# Altium PCB ArgoFCRev2.PcbDoc (part 2 of 6)
Units mm, origin at the board's own origin, x right, y up, seen from the top; angles counter-clockwise.
Board outline 140.21 x 119.63 mm, 4 copper layers (Top Layer, GND Plane, PWR Plane, Bottom Layer), stack 0.603 mm thick; 413 components, 223 nets, 1421 pads, 793 vias.
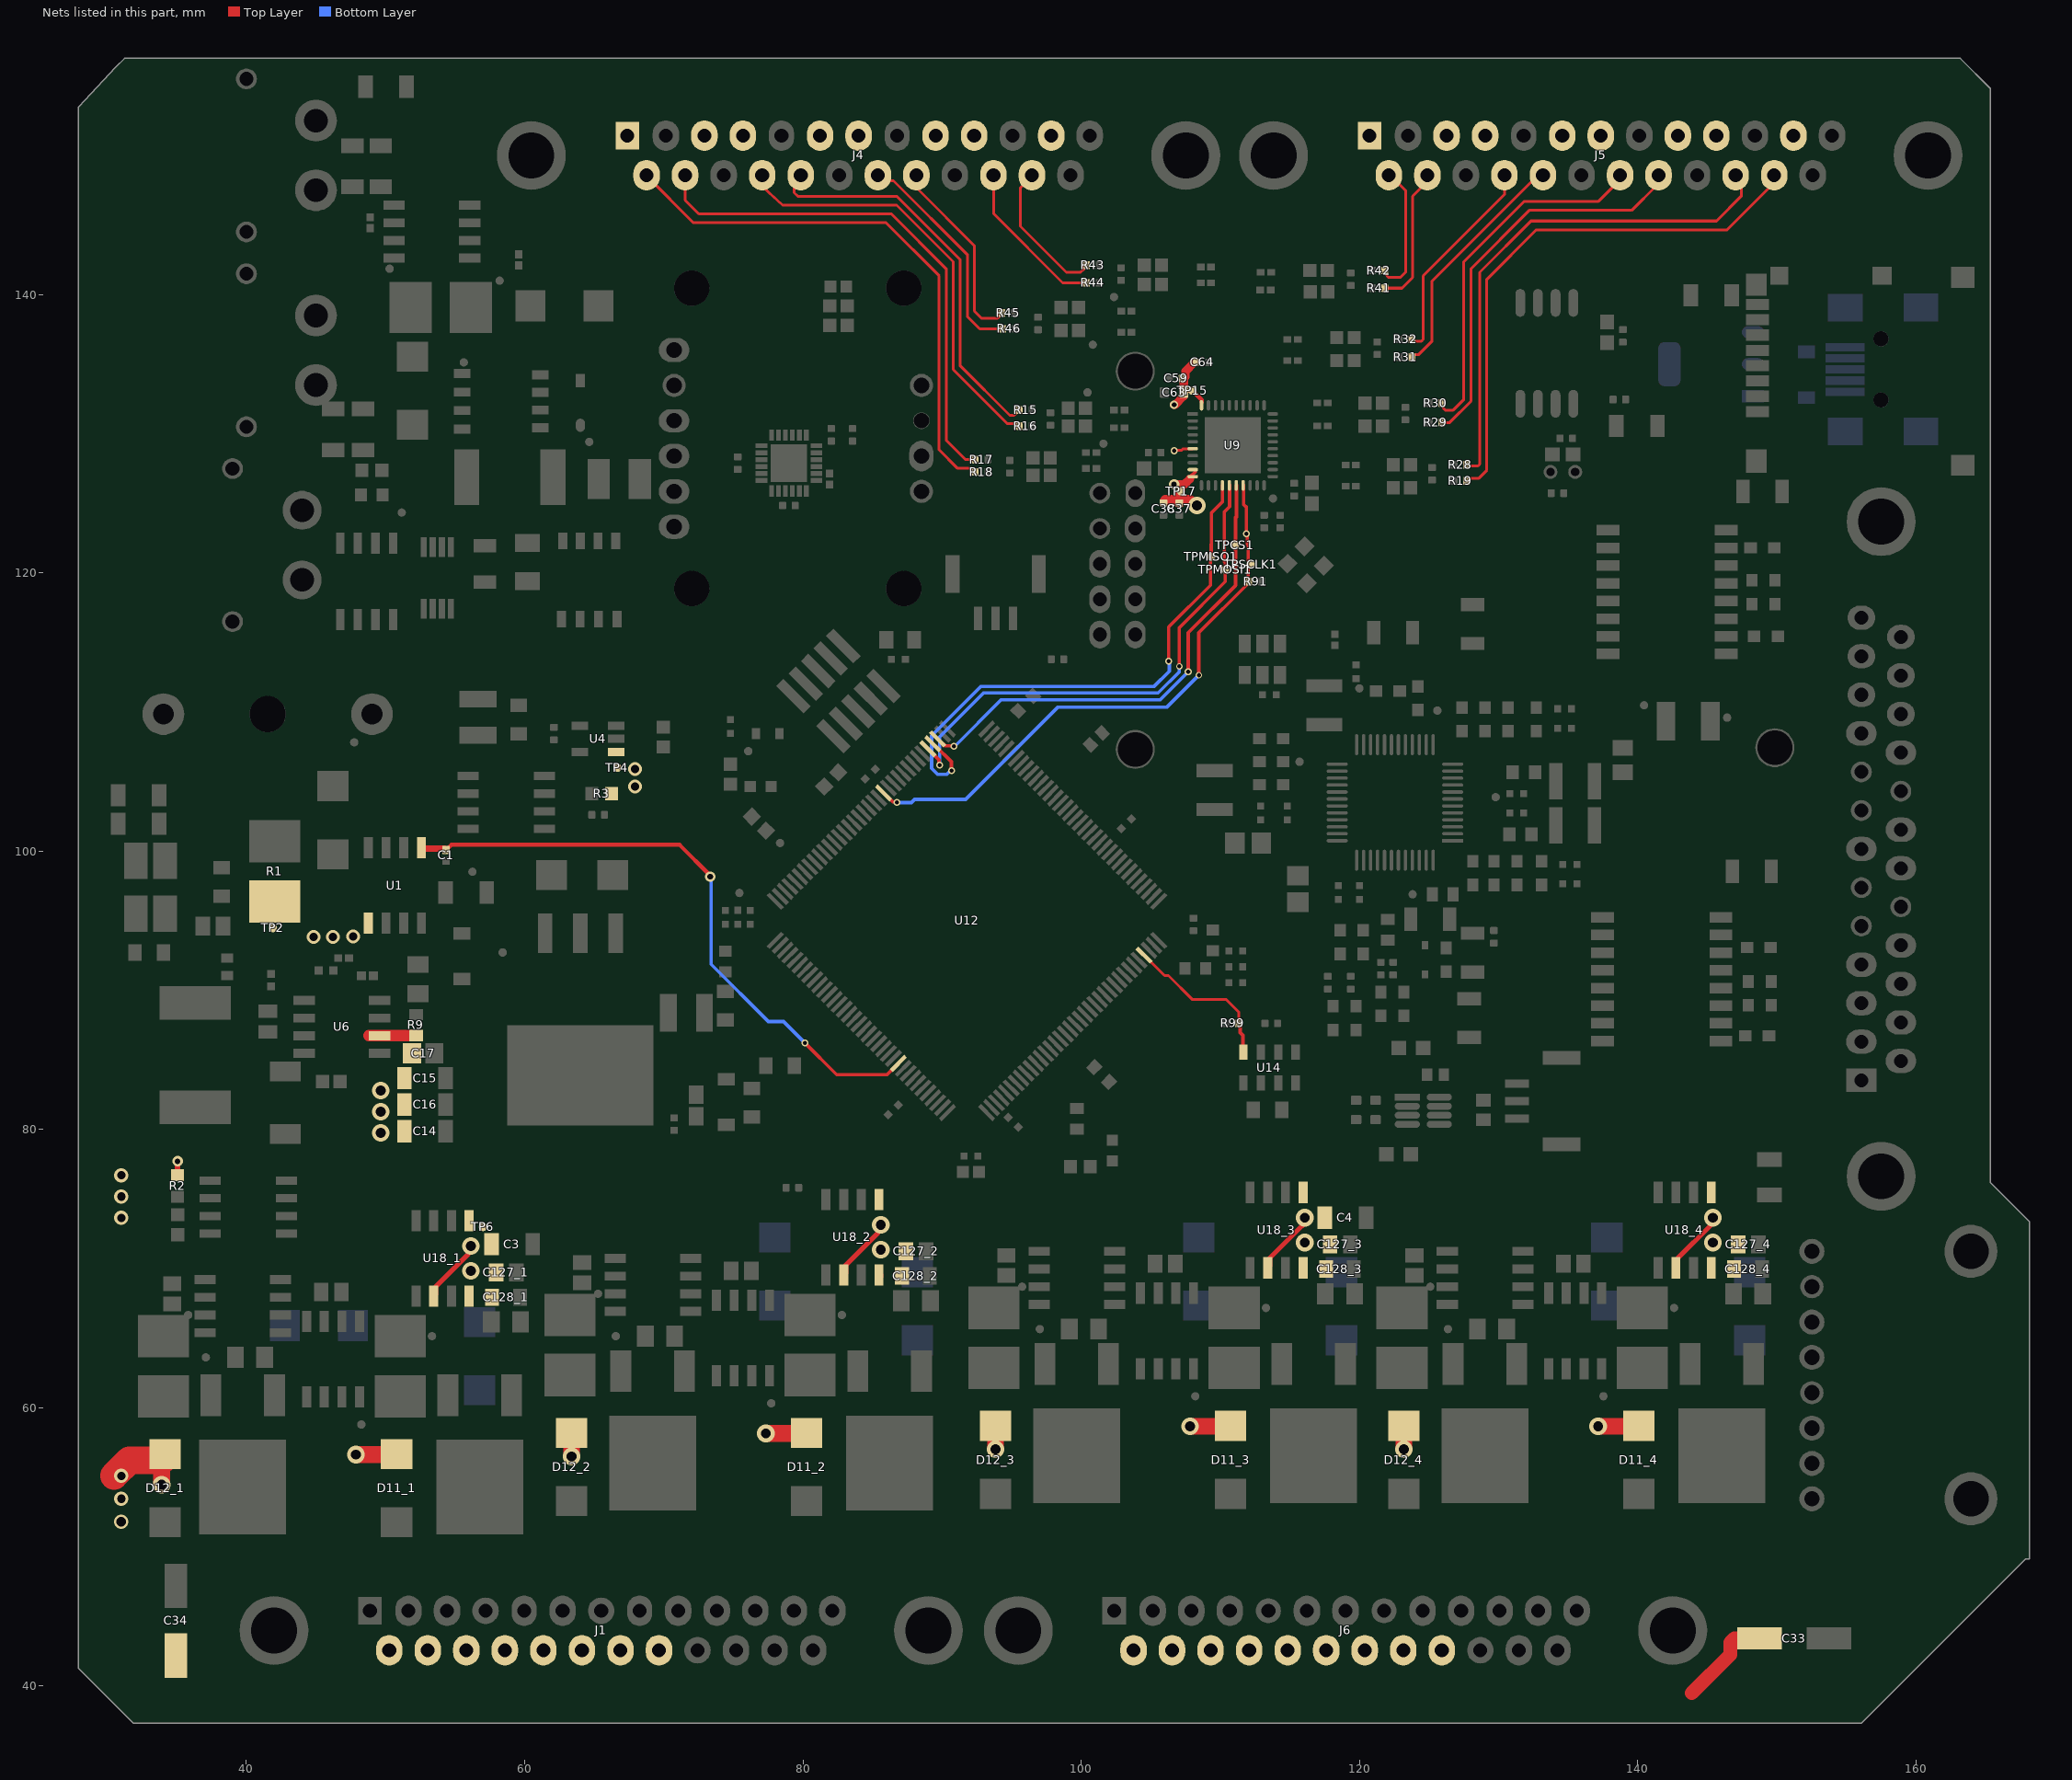
[diagram p4: the nets of this part, all layers, seen from the top]

## Footprints (in the part's own frame and the unit in brackets; to place one, negate y for a bottom-side part, rotate by r counter-clockwise, add the part's x,y. Pads: shape width x height; smd on the part's side, far side on the other; paste and mask are expansions set on the pad) (continued)
FP-MUSB-05-S-B-SM-A-MFG [mm]
  rect 0.6x2.8 smd paste+0 mask+0: 1(-1.6,-3.83) 2(-0.8,-3.83) 3(0,-3.83) 4(0.8,-3.83) 5(1.6,-3.83)
  rect 2x2.5 smd paste+0 mask+0: 6(-4.45,-3.83) 7(4.44,-3.83) 8(-4.45,1.62) 9(4.45,1.62)
  round 1.1 hole 1.1 unplated paste-2539.97 mask+0: ""(-2.2,-1.25) ""(2.2,-1.25)
  body extent -5,-4.9 5,4.6, height 4.1
FP-NCP18-0_15-IPC_A [mm]
  rect 1.306x1.058 smd paste+0 mask+0: 1(-0.776,0) 2(0.776,0)
  silkscreen extent -1.43,-0.93 1.43,0.93, body extent -1.93,-1.03 1.93,1.03, height 0.25
FP-PA2512E-0R001-0R004-MFG [mm]
  rect 3.05x3.68 smd paste+0 mask+0: 1(-2.16,0) 2(2.16,0)
  silkscreen extent -0.26,-1.72 0.26,1.72, body extent -3.78,-1.94 3.78,1.94, height 0.25
FP-RC0603-0_55-IPC_B [mm]
  rect 0.859x0.912 smd paste+0 mask+0: 1(-0.777,0) 2(0.777,0)
  silkscreen extent -1.21,-0.86 1.21,0.86, body extent -1.46,-0.71 1.46,0.71, height 0.25
FP-RMCF1210-IPC_A [mm]
  rect 1.604x2.855 smd paste+0 mask+0: 1(-1.476,0) 2(1.476,0)
  silkscreen extent -0.37,-1.43 0.37,1.43, body extent -2.78,-1.93 2.78,1.93, height 0.25
FP-RT0603-MFG [mm]
  rect 0.9x0.8 smd paste+0 mask+0: 1(-0.85,0) 2(0.85,0)
  silkscreen extent -0.85,-0.81 0.86,0.8, body extent -1.4,-0.55 1.4,0.55, height 0.25
FP-SM03B-GHS-TB_LF_SN-MFG [mm]
  rect 0.6x1.7 smd paste+0 mask+0: 1(-1.25,2.275) 2(0,2.275) 3(1.25,2.275)
  rect 1x2.7 smd paste+0 mask+0: 4(-3.1,-0.925) 5(3.1,-0.925)
  silkscreen extent -3.5,-2.02 3.5,3.8, body extent -3.7,-2.37 3.7,3.22, height 0.25
FP-SMBJ-MFG [mm]
  rect 2.16x2.26 smd paste+0 mask+0: 1(-2.45,0) 2(2.45,0)
  silkscreen extent -4.22,-1.97 2.37,1.97, body extent -3.63,-2.07 3.63,2.07, height 0.25
FP-SOD123-IPC_C [mm]
  rect 0.957x0.662 smd paste+0 mask+0: 1(-1.6,0)
  rrect100% 0.957x0.662 smd paste+0 mask+0: 2(1.6,0)
  silkscreen extent -2.82,-0.77 1.33,0.77, body extent -2.18,-0.87 2.18,0.87, height 0.25
FP-SOT223-0046067-IPC_C [mm]
  rect 1.604x0.88 smd paste+0 mask+0: 1(-3,-2.3)
  rrect100% 1.604x0.88 smd paste+0 mask+0: 2(-3,0) 3(-3,2.3)
  rrect55% 1.604x3.18 smd paste+0 mask+0: 4(3,0)
  body extent -3.5,-3.25 3.5,3.25, height 1.9
INDPM8682X400N [mm]
  rect 2.4x5.1 smd: 1(-3.75,0) 2(3.75,0)
  silkscreen extent -4.32,-4.09 4.32,4.09, body extent -4.3,-4.1 4.3,4.1, height 3.9
INF-PG-TDSON-8-1_V [mm]
  rect 0.65x1.2 smd: 1(-1.905,-2.825) 2(-0.635,-2.825) 3(0.635,-2.825) 4(1.905,-2.825) 5(2.007,2.794) 6(0.66,2.794) 7(-0.66,2.794) 8(-2.007,2.794)
  Top Layer region: 0.315,2.925 1.015,2.925 1.015,3.425 0.315,3.425
  Top Layer region: -1.015,2.925 -0.315,2.925 -0.315,3.425 -1.015,3.425
  Top Layer region: 1.65,2.925 2.35,2.925 2.35,3.425 1.65,3.425
  Top Layer region: -2.35,2.925 -1.65,2.925 -1.65,3.425 -2.35,3.425
  Top Layer region: -2.35,2.925 -2.35,-1.575 2.35,-1.575 2.35,2.925
  silkscreen extent -2.23,-3.94 -2.03,-3.74, body extent -2.58,-3.08 2.58,3.08, height 1
KTT0003B_N [mm]
  rect 2.85x1.05 smd: 1(-6.2,2.54) 2(-6.2,0) 3(-6.2,-2.54)
  rect 7.2x10.5 smd: 4(4,0)
  silkscreen extent -6.32,-5.2 0,5.2, body extent -6.78,-5.2 7.57,5.2, height 4.64
MCC-SOD123_V [mil]
  rect 35.98x47.99 smd: 1(-64.5,0) 2(64.5,0)
  silkscreen extent 102,-31 102,31, body extent -53,-31 53,31, height 53
MCHP-SOIC-S2A8_M [mm] "SOIC, 8-Leads, Body 5.275x5.275mm, Pitch 1.27mm, IPC Low Density"
  oval 2x0.7 smd: 1(-3.625,1.905) 2(-3.625,0.635) 3(-3.625,-0.635) 4(-3.625,-1.905) 5(3.625,-1.905) 6(3.625,-0.635) 7(3.625,0.635) 8(3.625,1.905)
  silkscreen extent -3.75,-2.7 2.23,2.93, body extent -2.7,-2.7 2.7,2.7, height 2.16
MOLX-502774-0891_V [mm] "SMD, 14-Leads, Body 15x14.3mm, Pitch 1.1mm"
  rect 0.8x1.68 smd: 1(-2.9,7.385) 2(-1.8,7.385) 3(-0.7,7.385) 4(0.4,7.385) 5(1.5,7.385) 6(2.6,7.385) 7(3.7,7.385) 8(4.8,7.385)
  rect 1.29x1.3 smd: 9(6.855,5.825)
  rect 1.29x1.4 smd: 10(6.855,-1.575)
  rect 1.5x1.7 smd: 11(6.75,-7.375) 12(-6.75,-7.375)
  rect 1.7x1.5 smd: 13(-6.45,7.475)
  rect 1.6x1.5 smd: 14(6.21,7.475)
  silkscreen extent -7.15,-7.88 7.15,8.9, body extent -7.15,-8 7.15,8, height 1.78
MPU6050 [mm]
  rect 0.8x0.35 smd: 1(-2,1.25) 2(-2,0.75) 3(-2,0.25) 4(-2,-0.25) 5(-2,-0.75) 6(-2,-1.25) 13(2,-1.25) 14(2,-0.75) 15(2,-0.25) 16(2,0.25) 17(2,0.75) 18(2,1.25)
  rect 0.35x0.85 smd: 7(-1.25,-1.975) 8(-0.75,-1.975) 9(-0.25,-1.975) 10(0.25,-1.975) 11(0.75,-1.975) 12(1.25,-1.975) 19(1.25,1.975) 20(0.75,1.975) 21(0.25,1.975) 22(-0.25,1.975) 23(-0.75,1.975) 24(-1.25,1.975)
  rect 2.7x2.6 smd: 25(0,0)
  silkscreen extent -3,-2 2,2, body extent -2,-2 2,2, height 1.05
MS5607-02BA03 [mm]
  rect 1.1x0.6 smd: 1(-1.1,1.875) 2(-1.1,0.625) 3(-1.1,-0.625) 4(-1.1,-1.875) 5(1.1,-1.875) 6(1.1,-0.625) 7(1.1,0.625) 8(1.1,1.875)
  silkscreen extent -1.5,-2.5 1.5,2.9, body extent -1.5,-2.4 1.5,2.6, height 0.95
ONSC-SOIC-8-751-07_V [mm]
  rect 1.52x0.6 smd: 1(-2.74,1.905) 2(-2.74,0.635) 3(-2.74,-0.635) 4(-2.74,-1.905) 5(2.74,-1.905) 6(2.74,-0.635) 7(2.74,0.635) 8(2.74,1.905)
  silkscreen extent -2.87,-2.45 1.57,2.88, body extent -3,-2.5 3,2.5, height 1.75
QFP50P2200X2200X160-144N [mm]
  rect 1.475x0.3 smd: 1(-10.738,8.75) 2(-10.738,8.25) 3(-10.738,7.75) 4(-10.738,7.25) 5(-10.738,6.75) 6(-10.738,6.25) 7(-10.738,5.75) 8(-10.738,5.25) 9(-10.738,4.75) 10(-10.738,4.25) 11(-10.738,3.75) 12(-10.738,3.25) 13(-10.738,2.75) 14(-10.738,2.25) 15(-10.738,1.75) 16(-10.738,1.25) 17(-10.738,0.75) 18(-10.738,0.25) 19(-10.738,-0.25) 20(-10.738,-0.75) 21(-10.738,-1.25) 22(-10.738,-1.75) 23(-10.738,-2.25) 24(-10.738,-2.75) 25(-10.738,-3.25) 26(-10.738,-3.75) 27(-10.738,-4.25) 28(-10.738,-4.75) 29(-10.738,-5.25) 30(-10.738,-5.75) 31(-10.738,-6.25) 32(-10.738,-6.75) 33(-10.738,-7.25) 34(-10.738,-7.75) 35(-10.738,-8.25) 36(-10.738,-8.75) 73(10.738,-8.75) 74(10.738,-8.25) 75(10.738,-7.75) 76(10.738,-7.25) 77(10.738,-6.75) 78(10.738,-6.25) 79(10.738,-5.75) 80(10.738,-5.25) 81(10.738,-4.75) 82(10.738,-4.25) 83(10.738,-3.75) 84(10.738,-3.25) 85(10.738,-2.75) 86(10.738,-2.25) 87(10.738,-1.75) 88(10.738,-1.25) 89(10.738,-0.75) 90(10.738,-0.25) 91(10.738,0.25) 92(10.738,0.75) 93(10.738,1.25) 94(10.738,1.75) 95(10.738,2.25) 96(10.738,2.75) 97(10.738,3.25) 98(10.738,3.75) 99(10.738,4.25) 100(10.738,4.75) 101(10.738,5.25) 102(10.738,5.75) 103(10.738,6.25) 104(10.738,6.75) 105(10.738,7.25) 106(10.738,7.75) 107(10.738,8.25) 108(10.738,8.75)
  rect 0.3x1.475 smd: 37(-8.75,-10.738) 38(-8.25,-10.738) 39(-7.75,-10.738) 40(-7.25,-10.738) 41(-6.75,-10.738) 42(-6.25,-10.738) 43(-5.75,-10.738) 44(-5.25,-10.738) 45(-4.75,-10.738) 46(-4.25,-10.738) 47(-3.75,-10.738) 48(-3.25,-10.738) 49(-2.75,-10.738) 50(-2.25,-10.738) 51(-1.75,-10.738) 52(-1.25,-10.738) 53(-0.75,-10.738) 54(-0.25,-10.738) 55(0.25,-10.738) 56(0.75,-10.738) 57(1.25,-10.738) 58(1.75,-10.738) 59(2.25,-10.738) 60(2.75,-10.738) 61(3.25,-10.738) 62(3.75,-10.738) 63(4.25,-10.738) 64(4.75,-10.738) 65(5.25,-10.738) 66(5.75,-10.738) 67(6.25,-10.738) 68(6.75,-10.738) 69(7.25,-10.738) 70(7.75,-10.738) 71(8.25,-10.738) 72(8.75,-10.738) 109(8.75,10.738) 110(8.25,10.738) 111(7.75,10.738) 112(7.25,10.738) 113(6.75,10.738) 114(6.25,10.738) 115(5.75,10.738) 116(5.25,10.738) 117(4.75,10.738) 118(4.25,10.738) 119(3.75,10.738) 120(3.25,10.738) 121(2.75,10.738) 122(2.25,10.738) 123(1.75,10.738) 124(1.25,10.738) 125(0.75,10.738) 126(0.25,10.738) 127(-0.25,10.738) 128(-0.75,10.738) 129(-1.25,10.738) 130(-1.75,10.738) 131(-2.25,10.738) 132(-2.75,10.738) 133(-3.25,10.738) 134(-3.75,10.738) 135(-4.25,10.738) 136(-4.75,10.738) 137(-5.25,10.738) 138(-5.75,10.738) 139(-6.25,10.738) 140(-6.75,10.738) 141(-7.25,10.738) 142(-7.75,10.738) 143(-8.25,10.738) 144(-8.75,10.738)
  silkscreen extent -11.35,-9.65 9.65,9.65, body extent -10.95,-10.95 10.95,10.95, height 1.6
QTB-QBLP595_V [mm] "SMD, 2-Leads, Body 1x0.5mm"
  rrect25% 0.5x0.55 smd: 1(-0.455,0) 2(0.455,0)
  silkscreen extent -0.9,-0.2 -0.9,0.2, body extent -0.5,-0.25 0.5,0.25, height 0.5
RESC0402(1005)_L [mm]
  rrect25% 0.5x0.55 smd: 1(-0.45,0) 2(0.45,0)
  silkscreen extent 0,-0.2 0,0.2, body extent -0.5,-0.25 0.5,0.25, height 0.3
RESC1608X55X25ML10T15 [mm]
  rect 0.8x1 smd: 1(-0.75,0) 2(0.75,0)
  body extent -0.85,-0.45 0.85,0.45, height 0.55
RESC1609X50X30ML08T20 [mm] "Chip Resistor, 2-Leads, Body 1.65x0.95mm, IPC Low Density"
  rect 0.9x1.05 smd: 1(-0.7,0) 2(0.7,0)
  body extent -0.82,-0.48 0.82,0.48, height 0.5
RESC2013X60X40ML20T25 [mm] "Chip Resistor, 2-Leads, Body 2.00x1.25mm, IPC Low Density"
  rect 1.4x1.55 smd: 1(-0.95,0) 2(0.95,0)
  body extent -1.1,-0.72 1.1,0.72, height 0.6
RESC2013X70X40NL20T20 [mm] "Chip Resistor, 2-Leads, Body 2.00x1.25mm, IPC Medium Density"
  rect 1.15x1.45 smd: 1(-0.875,0) 2(0.875,0)
  body extent -1.1,-0.72 1.1,0.72, height 0.7
SMTC-FTSH-105-01-L-DV-K_V [mm]
  rect 0.74x2.79 smd: 1(-2.54,-2.035) 2(-2.54,2.035) 3(-1.27,-2.035) 4(-1.27,2.035) 5(0,-2.035) 6(0,2.035) 7(1.27,-2.035) 8(1.27,2.035) 9(2.54,-2.035) 10(2.54,2.035)
  silkscreen extent -3.18,-4.1 3.18,0.34, body extent -3.17,-2.92 3.18,2.92, height 6.12
SODFL5336X130N [mm]
  rect 1.42x2.23 smd: 1(-2.25,0) 2(2.25,0)
  silkscreen extent -2.96,-1.8 2.15,1.8, body extent -2.65,-1.8 2.65,1.8, height 1.3
SOIC127P600X175-8N [mm]
  rect 1.525x0.65 smd: 1(-2.712,1.905) 2(-2.712,0.635) 3(-2.712,-0.635) 4(-2.712,-1.905) 5(2.712,-1.905) 6(2.712,-0.635) 7(2.712,0.635) 8(2.712,1.905)
  silkscreen extent -3.47,-2.45 1.6,2.58, body extent -3,-2.45 3,2.45, height 1.75
SOP65P490X110-8N [mm]
  rect 1.425x0.45 smd: 1(-2.212,0.975) 2(-2.212,0.325) 3(-2.212,-0.325) 4(-2.212,-0.975) 5(2.212,-0.975) 6(2.212,-0.325) 7(2.212,0.325) 8(2.212,0.975)
  silkscreen extent -2.93,-1.5 1.15,1.55, body extent -2.45,-1.5 2.45,1.5, height 1.1
SOT95P285X140-5N [mm]
  rect 1.2x0.6 smd: 1(-1.3,0.95) 2(-1.3,0) 3(-1.3,-0.95) 4(1.3,-0.95) 5(1.3,0.95)
  silkscreen extent -1.9,-1.48 0.35,1.5, body extent -1.43,-1.48 1.43,1.48, height 1.4
TP06R#1 [mm]
  round 0.6 smd paste-1: 1(0.26,0)
TP06R#2 [mm]
  round 0.6 smd paste-1: 1(-3.33,0)
TP06R#3 [mm]
  round 0.6 smd paste-1: 1(-8,0)
TP06R#4 [mm]
  round 0.6 smd paste-1: 1(0,0)
TP06R#5 [mm]
  round 0.6 smd paste-1: 1(7,0)
TP06R#6 [mm]
  round 0.6 smd paste-1: 1(40.773,0)
TP06R#7 [mm]
  round 0.6 smd paste-1: 1(2.007,3.007)
TP06R#8 [mm]
  round 0.6 smd paste-1: 1(1,-5)
TP06R#9 [mm]
  round 0.6 smd paste-1: 1(0,0.712)
TP06R#10 [mm] "Testpoint, round, d=0.6mm"
  round 0.6 smd paste-1: 1(2.734,-0.239)
TP06R#11 [mm]
  round 0.6 smd paste-1: 1(-0.03,0.288)
TP06R#12 [mm]
  round 0.6 smd paste-1: 1(0,-1)
TP06R#13 [mm] "Testpoint, round, d=0.6mm"
  round 0.6 smd paste-1: 1(-0.255,0)
TP06R#14 [mm]
  round 0.6 smd paste-1: 1(4,4)
TP06R#15 [mm]
  round 0.6 smd paste-1: 1(0.331,-4)
XLH536050000000I [mm]
  rect 0.89x1.29 smd: 1(-1.27,-1.125) 2(0,-1.125) 3(1.27,-1.125) 4(1.27,1.125) 5(0,1.125) 6(-1.27,1.125)
  silkscreen extent -2.5,-2.1 2.5,1.6, body extent -2.5,-1.68 2.5,1.68, height 1.3
XT30PWF#1 [mm]
  round 2.8 hole 1.7: 1(0,0) 2(5,0)
  round 1.5 hole 1: 3(-3,5) 4(8,5)
  silkscreen extent -4.15,3 9.15,15, body extent -4.15,-0.96 9.15,13.93, height 5.21
XT30PWF#2 [mm]
  round 3 hole 1.7: 1(0,0) 2(5,0)
  round 1.5 hole 1: 3(-3,5) 4(8,5)
  silkscreen extent -4.15,3 9.15,15, body extent -4.15,-0.96 9.15,13.93, height 5.21

## Part data
Boot1 Boot2 TP1 TP2 TP3 TP4 TP5 TP6 TP7 TP13 TP14 TP15 TP16 TP17 TP18 TP19 TP20 TP21 TP22 TP23 TP24 TP28 TP29 TP30 TP31 TP32 TPC1 TPCS1 TPG1 TPL1_1 TPL1_2 TPL1_3 TPL1_4 TPL2_1 TPL2_2 TPL2_3 TPL2_4 TPLA1_1 TPLA1_2 TPLA1_3 TPLA1_4 TPLB1_1 TPLB1_2 TPLB1_3 TPLB1_4 TPMISO1 TPMOSI1 TPSCLK1: library part CMP-00028-00002-2, "0.6mm round", Pins=1
C1 C2 C131 C132: library part CMP-001-00001-6, "Chip Capacitor, 0.1 uF, +/- 5%, 16 V, 0402 (1005 Metric)", Capacitor Type=Ceramic, Case/Package=0402, Max Operating Temperature=125°C, Min Operating Temperature=-55°C, Tolerance=5%, Voltage Rating=16V, Mounting Technology=SM, Pins=2, RoHS Compliant=True
C3 C4 C6 C7 C14 C15 C16 C20 C24 C25 C134 C135 C136 C137 C138: library part CMP-2000-05256-2, "CAP CER 10UF 50V X5R 1206", Manufacturer="Murata Electronics North America", Manufacturer Part Number=GRM31CR61H106KA12L, Package=GRM31-0.2, Temperature="-55°C to +85°C", Temperature Characteristic=X5R, Temperature Coefficient=15%, Temperature Range High=+85°C, Temperature Range Low=-55°C, Tolerance=10%, Voltage Rating=50V, Automotive=No, Capacitance=10uF, Category=Cap, ComponentLink2Description=Datasheet, ComponentLink2URL=https://search.murata.co.jp/Ceramy/image/img/A01X/G101/ENG/GRM31CR61H106KA12-01A.pdf, Device Class L1="Passive Components", Device Class L2=Capacitors, Device Class L3="Ceramic Capacitors", Digikey Description="CAP CER 10UF 50V X5R 1206", Height=1.8mm, Lead Free=Yes, Material=Ceramic, Mouser Description="Multilayer Ceramic Capacitors MLCC - SMD/SMT 1206 10uF 50volt X5R +/-10%", Octopart=https://octopart.com/grm31cr61h106ka12l-murata-18903335, RoHS=TRUE
C5 C8 C9 C10 C21 C113 C126: library part CMP-2000-07546-2, "Cap Ceramic 100nF 50V X7R 10% Pad SMD 0603 +125°C Automotive T/R", Case Code (Imperial)=0603, Case Code (Metric)=1608, Dielectric=X7R, Max Operating Temperature=125°C, Min Operating Temperature=-55°C, Package Quantity=1, Ratings=AEC-Q200, Tolerance=10%, Voltage=50V, Capacitance=100nF, Case/Package=0603, Composition=Ceramic, Depth=0.8mm, Height=0.8mm, Lead Free="Lead Free", Length=1.6mm, Mount="Surface Mount", Packaging="Tape and Reel", Radiation Hardening=No, REACH SVHC="No SVHC", Termination=SMD/SMT, Thickness=0.035inch, Voltage Rating=50V, Voltage Rating (DC)=50V, Weight=7.1E-05oz, Width=0.8mm
C11 C12: library part CMP-2000-06020-2, "CAP CER 47UF 16V X5R 1210", Case Code (Imperial)=1210, Case Code (Metric)=3225, Dielectric=X5R, Dielectric Material=Ceramic, Max Operating Temperature=85°C, Min Operating Temperature=-55°C, Package Quantity=1, Tolerance=20%, Voltage=16V, Capacitance=47uF, Case/Package=1210, Contact Plating=Tin, Depth=2.5mm, Dissipation Factor=10%, Height=2.5mm, Lead Free="Lead Free", Length=3.2mm, Mount="Surface Mount", Number of Pins=2, Packaging="Tape and Reel", Radiation Hardening=No, REACH SVHC="No SVHC", RoHS Compliant=Yes, Series=C, Termination=SMD/SMT, Thickness=0.11inch, Voltage Rating=16V, Voltage Rating (DC)=16V, Width=0.098inch
C13 C122 C124: library part CMP-001-00017-6, "Chip Capacitor, 100 nF, +/- 10%, 50 V, 0603 (1608 Metric)", Capacitor Type=Ceramic, Case/Package=0603, Max Operating Temperature=125°C, Min Operating Temperature=-55°C, Tolerance=10%, Voltage Rating=50V, Mounting Technology=SM, Pins=2, RoHS Compliant=True
C17: library part CMP-2007-03708-1, "C0805F103K5RACTU 10000 pF ±10% 50V Ceramic Capacitor X7R 0805 (2012 Metric)", Manufacturer=Kemet, Part Number=C0805F103K5RACTU
C18 C19: library part CMP-2000-06362-2, "CAP CER 47UF 16V X5R 1210", Case Code (Imperial)=1210, Case Code (Metric)=3225, Dielectric=X5R, Max Operating Temperature=85°C, Min Operating Temperature=-55°C, Package Quantity=1, Tolerance=10%, Voltage=16V, Capacitance=47uF, Case/Package=1210, Depth=2.5mm, Height=2.5mm, Lead Free="Lead Free", Length=3.2mm, Material=Ceramic, Mount="Surface Mount", Number of Pins=2, Packaging="Cut Tape", Radiation Hardening=No, REACH SVHC="No SVHC", RoHS Compliant=Yes, Termination=SMD/SMT, Thickness=0.106inch, Voltage Rating=16V, Voltage Rating (DC)=16V, Width=0.098inch
C22: library part CMP-2007-00462-2, "CAP CER 10PF 50V 10% NP0 0805C0805C100K5GACTU", Capacitance="10 pF", Manufacturer=KEMET, Manufacturer Part Number=C0805C100K5GACTU, Package=C0805C-DN, Temperature="-55°C to +125°C", Temperature Characteristic=C0G, Temperature Coefficient=30ppm/°C, Temperature Range High=+125°C, Temperature Range Low=-55°C, Tolerance=0.1, Voltage Rating="50 V", Automotive=No, Category=Cap, ComponentLink2Description=Datasheet, ComponentLink2URL=https://content.kemet.com/datasheets/KEM_C1003_C0G_SMD.pdf, Device Class L1="Passive Components", Device Class L2=Capacitors, Device Class L3="Ceramic Capacitors", Digikey Description="CAP CER 10PF 50V 10% NP0 0805", Height=0.88mm, Ipc Land Pattern Name=CAPC200125X78, Lead Free=Yes, Material=Ceramic, Mouser Description="Multilayer Ceramic Capacitors MLCC - SMD/SMT 50volts 10pF C0G 10%", Octopart=https://octopart.com/c0805c100k5gactu-kemet-8089747, RoHS=TRUE
C23: library part CMP-2008-03950-1, "GRM155R71C822KA01D    / CAP CER 8200PF 16V X7R 0402", Manufacturer=Murata, Part Number=GRM155R71C822KA01D
C26: library part CMP-13271-001564-1, "CL21 Series 0805 2.2nF 50V ±5% Tolerance C0G Multilayer Ceramic Chip Capacitor CL21C222JBFNNNE", Case Code (Imperial)=0805, Case Code (Metric)=2012, Dielectric=C0G, Max Operating Temperature=125°C, Min Operating Temperature=-55°C, Package Quantity=2000, Tolerance=5%, Voltage=50V, Capacitance=2.2nF, Case/Package=0805, Depth=1.25mm, Height=1.25mm, Lead Free="Lead Free", Length=2mm, Mount="Surface Mount", Packaging="Tape and Reel", Radiation Hardening=No, Thickness=0.053inch, Voltage Rating=50V, Voltage Rating (DC)=50V, Width=0.049inch
C27 C100 C101 C102 C103 C104 C105 C106 C107 C108 C109 C110 C111: library part CMP-03422-000048-1, "CAP CER 0.1UF 16V X7R 0402", Capacitance="100 nF", Manufacturer=YAGEO, Manufacturer Part Number=CC0402KRX7R7BB104, Package=CC0402, Temperature="-55°C to +125°C", Temperature Characteristic=X7R, Temperature Coefficient=30ppm/°C, Temperature Range High=+125°C, Temperature Range Low=-55°C, Tolerance=0.1, Voltage Rating="16 V", Automotive=No, Automotive Grade=NA, Category=Cap, ComponentLink2Description=Datasheet, ComponentLink2URL=http://www.yageo.com/documents/recent/UPY-GP_NP0_16V-to-50V_16.pdf, Device Class L1="Passive Components", Device Class L2=Capacitors, Device Class L3="Ceramic Capacitors", Digikey Description="CAP CER 0.1UF 16V X7R 0402", Footprint Url=http://www.yageo.com/exep/pages/download/literatures/UPY-C_GEN_24.pdf, Height=0.55mm, Ipc Land Pattern Name=CAPC10050X50, Lead Free=Yes, Material=Ceramic, Mouser Description="0402 0.1 uF 16 V ±10 % Tolerance X7R SMT Multilayer Ceramic Capacitor", Octopart=https://octopart.com/cc0402krx7r7bb104-yageo-42244624, RoHS=TRUE
C28 C128_1 C128_2 C128_3 C128_4: library part CMP-07738-122049624-1, "08051C105K4T2A Cap Ceramic 1uF 100V X7R 10% Pad SMD 0805 125C Automotive T/R", Capacitance=1µF, Case/Package=0805, Dielectric=X7R, Max Operating Temperature=125°C, Min Operating Temperature=-55°C, Tolerance=10%, Voltage Rating=100V, Height=1.4mm, Lifecycle Status=Production, Material=Ceramic, NexarPartId=122049624, RoHS=Compliant, Schedule B=8532240020, Voltage Rating (DC)=100V
C29 C31 C117 C119: library part CMP-001-00065-4, "Chip Capacitor, 100nF +/-20%, 25V, 0402, Thickness 0.6 mm", Case/Package=0402, Max Operating Temperature=85°C, Min Operating Temperature=-55°C, Tolerance=10%, Voltage Rating=25V, Mounting Technology=SMT, Pins=2
C30 C32 C52 C54: library part CMP-001-00003-6, "Chip Capacitor, 1 uF, +/- 10%, 16 V, 0603 (1608 Metric)", Capacitor Type=Ceramic, Case/Package=0603, Max Operating Temperature=125°C, Min Operating Temperature=-55°C, Tolerance=10%, Voltage Rating=16V, Mounting Technology=SM, Pins=2, RoHS Compliant=True
C33 C34: library part CMP-2000-06209-2, "CAP ALUM 22UF 20% 50V SMD", Case/Package=Radial, Dielectric Material=Aluminium, ESR (Equivalent Series Resistance)=880mR, Leakage Current=3uA, Max Operating Temperature=105°C, Min Operating Temperature=-55°C, Package Quantity=1000, Ripple Current=165mA, Tolerance=20%, Voltage=50V, Capacitance=22uF, Construction=Cylindrical, Contact Plating=Tin, Diameter=6.3mm, Height=5.8mm, Height - Seated (Max)=0.24inch, Impedance=880mR, Lead Free="Lead Free", Length=5.8mm, Life (Hours)=2000Hour, Mount="Surface Mount", Number of Pins=2, Packaging="Tape and Reel", Polarity=Polar, Radiation Hardening=No, REACH SVHC="No SVHC", Ripple Current (AC)=165mA, RoHS Compliant=Yes, Series=FK, Termination=SMD/SMT, Voltage Rating=50V, Voltage Rating (DC)=50V, Width=7.8mm
C35 C39 C42 C44 C45 C47 C48 C50 C55 C57 C58 C61 C62 C66 C67 C69: library part CMP-001-00066-3, "Chip Capacitor, 1nF +/-20%, 50V, 0402, Thickness 0.33 mm", Case/Package=0402, Max Operating Temperature=85°C, Min Operating Temperature=-55°C, Tolerance=10%, Voltage Rating=50V, Mounting Technology=SMT, Pins=2
C36 C38 C41 C43 C46 C49 C56 C60 C65 C68: library part CMP-001-00069-3, "Chip Capacitor, 10nF +/-20%, 50V, 0402, Thickness 0.6 mm", Case/Package=0402, Max Operating Temperature=85°C, Min Operating Temperature=-55°C, Tolerance=5%, Voltage Rating=50V, Mounting Technology=SMT, Pins=2
C37 C40 C51 C53 C59 C64 C70: library part CMP-001-00067-3, "Chip Capacitor, 100nF +/-20%, 50V, 0402, Thickness 0.6 mm", Case/Package=0402, Max Operating Temperature=85°C, Min Operating Temperature=-55°C, Tolerance=10%, Voltage Rating=50V, Mounting Technology=SMT, Pins=2
C63: library part CMP-001-00076-4, "Chip Capacitor, 4.7µF +/-20%, 10V, 0603, Thickness 1 mm", Case/Package=0603, Max Operating Temperature=85°C, Min Operating Temperature=-55°C, Tolerance=10%, Voltage Rating=10V, Mounting Technology=SMT, Pins=2
C71: library part CMP-001-00056-4, "Chip Capacitor, 2,2µF +/-20%, 10V, 0402, Thickness 0.6 mm", Case/Package=0402, Max Operating Temperature=85°C, Min Operating Temperature=-55°C, Tolerance=10%, Voltage Rating=10V, Mounting Technology=SMT, Pins=2
C72 C114: library part CMP-1035-00158-3, "CAP CER 2.2PF 50V NP0 0603", Capacitance="2.2 pF", Manufacturer=KEMET, Manufacturer Part Number=C0603C229C5GACTU, Package=C0603C-CF, Temperature="-55°C to +125°C", Temperature Characteristic=C0G, Temperature Coefficient=30ppm/°C, Temperature Range High=+125°C, Temperature Range Low=-55°C, Tolerance="0.25 pF", Voltage Rating="50 V", Automotive=Yes, Automotive Grade="Grade 1", Category=Cap, ComponentLink2Description=Datasheet, ComponentLink2URL=https://api.kemet.com/component-edge/download/datasheet/C0603C100J5GACAUTO.pdf, Device Class L1="Passive Components", Device Class L2=Capacitors, Device Class L3="Ceramic Capacitors", Digikey Description="CAP CER 2.2PF 50V NP0 0603", Height=0.87mm, Lead Free=Yes, Material=Ceramic, Mouser Description="Multilayer Ceramic Capacitors MLCC - SMD/SMT 50volts 2.2pF C0G 0.25%", Octopart=https://octopart.com/c0603c229c5gactu-kemet-3874912, RoHS=TRUE
C73: library part CMP-1038-00549-1, "CAP 1nF 100V ±5% 1210 (3225 Metric) Thickness 1.7mm SMD", Case-EIA=1210, Case-Metric=3225, Rated Voltage="100 V", Tolerance=Â±5%, Max Thickness="1.7 mm", Technology=SMT
C76 C80 C82 C83 C84 C86 C87 C91 C92 C95 C96 C98: library part CMP-03422-000748-1, "CAP CER 0.1UF 10V X7R 0402", Capacitance="100 nF", Manufacturer=YAGEO, Manufacturer Part Number=CC0402KRX7R6BB104, Package=CC0402, Temperature="-55°C to +125°C", Temperature Characteristic=X7R, Temperature Coefficient=30ppm/°C, Temperature Range High=+125°C, Temperature Range Low=-55°C, Tolerance=0.1, Voltage Rating="10 V", Automotive=No, Automotive Grade=NA, Category=Cap, ComponentLink2Description=Datasheet, ComponentLink2URL=http://www.yageo.com/documents/recent/UPY-GP_NP0_16V-to-50V_16.pdf, Device Class L1="Passive Components", Device Class L2=Capacitors, Device Class L3="Ceramic Capacitors", Digikey Description="CAP CER 0.1UF 10V X7R 0402", Footprint Url=http://www.yageo.com/exep/pages/download/literatures/UPY-C_GEN_24.pdf, Height=0.55mm, Ipc Land Pattern Name=CAPC10050X50, Lead Free=Yes, Material=Ceramic, Mouser Description="Multilayer Ceramic Capacitors MLCC - SMD/SMT 100nF 10V X7R 10%", Octopart=https://octopart.com/cc0402krx7r6bb104-yageo-8376509, RoHS=TRUE
C77 C79 C81 C85: library part CMP-1038-02268-1, "CAP 22uF 10V ±10% 1210 (3225 Metric) Thickness 2.8mm SMD", Case-EIA=1210, Case-Metric=3225, Rated Voltage="10 V", Tolerance=Â±10%, Max Thickness="2.8 mm", Technology=SMT
C78 C88 C89 C90 C93: library part CMP-1037-04967-1, "CAP 10uF 10V ±10% 1206 (3216 Metric) Thickness 1.9mm SMD", Case-EIA=1206, Case-Metric=3216, Rated Voltage="10 V", Tolerance=Â±10%, Max Thickness="1.9 mm", Technology=SMT
C94 C97: library part CMP-03020-034681-1, "CAP CER 1000PF 2KV X7R 1206", Capacitance=1nF, Case Code (Imperial)=1206, Case Code (Metric)=3216, Dielectric=X7R, Dielectric Material=Ceramic, Max Operating Temperature=125°C, Min Operating Temperature=-55°C, Package Quantity=1, Tolerance=10%, Voltage=2kV, Voltage Rating (DC)=2.5kV, Case/Package=1206, Construction=Flat, Depth=1.6mm, Dissipation Factor=2.5%, Height=1.6mm, Length=3.2mm, Mount="Surface Mount", Number of Pins=2, Packaging="Tape and Reel", Radiation Hardening=No, REACH SVHC="No SVHC", RoHS Compliant=Yes, Series=C, Termination=SMD/SMT, Thickness=0.069inch, Voltage Rating=2kV, Width=0.063inch
C99: library part CMP-03020-015218-1, "CAP CER 18PF 16V NP0 0402", Capacitance="18 pF", Manufacturer=Kemet, Manufacturer Part Number=C0402C180J4GAC7867, Package=C0402-BB, Temperature="-55°C to +125°C", Temperature Characteristic=C0G, Temperature Coefficient=15%, Temperature Range High=+125°C, Temperature Range Low=-55°C, Tolerance=0.05, Voltage Rating="16 V", Automotive=No, Category=Cap, ComponentLink2Description=Datasheet, ComponentLink2URL=https://content.kemet.com/datasheets/KEM_C1002_X7R_SMD.pdf, Device Class L1="Passive Components", Device Class L2=Capacitors, Device Class L3="Ceramic Capacitors", Digikey Description="CAP CER 18PF 16V NP0 0402", Height=0.55mm, Ipc Land Pattern Name=CAPC10050X50, Lead Free=Yes, Material=Ceramic, Octopart=https://octopart.com/c0402c180j4gac7867-kemet-1878870, RoHS=TRUE
C112 C116 C118 C120: library part CMP-03422-000441-1, "CAP CER 2.2UF 10V X5R 0603", Capacitance="2.2 uF", Manufacturer=YAGEO, Manufacturer Part Number=CC0603MRX5R6BB225, Package=CC0603-DA, Temperature="-55°C to +125°C", Temperature Characteristic=X5R, Temperature Coefficient=15%, Temperature Range High=+125°C, Temperature Range Low=-55°C, Tolerance=0.2, Voltage="10 V", Automotive=No, Category=Cap, ComponentLink2Description=Datasheet, ComponentLink2URL=http://www.yageo.com/documents/recent/UPY-GPHC_X7R_6.3V-to-50V_18.pdf, Device Class L1="Passive Components", Device Class L2=Capacitors, Device Class L3="Ceramic Capacitors", Digikey Description="CAP CER 2.2UF 10V X5R 0603", Footprint Url=http://www.yageo.com/exep/pages/download/literatures/UPY-C_GEN_24.pdf, Height=0.9mm, Lead Free=Yes, Material=Ceramic, Mouser Description="Multilayer Ceramic Capacitors MLCC - SMD/SMT 2.2uF 10V X5R 20%", Octopart=https://octopart.com/cc0603mrx5r6bb225-yageo-40952238, RoHS=TRUE, Voltage Rating="10 V"
C115: library part CMP-03422-000441-1, "CAP CER 2.2UF 10V X5R 0603", Capacitance="2.2 uF", Manufacturer=YAGEO, Package=CC0603-DA, Temperature="-55°C to +125°C", Temperature Characteristic=X5R, Temperature Coefficient=15%, Temperature Range High=+125°C, Temperature Range Low=-55°C, Tolerance=0.2, Voltage="10 V", Automotive=No, Category=Cap, ComponentLink2Description=Datasheet, ComponentLink2URL=http://www.yageo.com/documents/recent/UPY-GPHC_X7R_6.3V-to-50V_18.pdf, Device Class L1="Passive Components", Device Class L2=Capacitors, Device Class L3="Ceramic Capacitors", Digikey Description="CAP CER 2.2UF 10V X5R 0603", Footprint Url=http://www.yageo.com/exep/pages/download/literatures/UPY-C_GEN_24.pdf, Height=0.9mm, Lead Free=Yes, Manufacturer Part Number=CC0603MRX5R6BB225, Material=Ceramic, Mouser Description="Multilayer Ceramic Capacitors MLCC - SMD/SMT 2.2uF 10V X5R 20%", Octopart=https://octopart.com/cc0603mrx5r6bb225-yageo-40952238, RoHS=TRUE, Voltage Rating="10 V"
C121: library part CMP-2008-01093-1, "2.2nF 0402", Manufacturer=Vitramon, Part Number=VJ0402Y222KXAAP
C123 C125: library part CMP-001-00005-6, "Chip Capacitor, 1 uF, +/- 10%, 25 V, 0603 (1608 Metric)", Capacitor Type=Ceramic, Case/Package=0603, Max Operating Temperature=125°C, Min Operating Temperature=-55°C, Tolerance=10%, Voltage Rating=25V, Mounting Technology=SM, Pins=2, RoHS Compliant=True
C127_1 C127_2 C127_3 C127_4 C129_1 C129_2 C129_3 C129_4 C130_1 C130_2 C130_3 C130_4: library part CMP-001-00018-6, "Chip Capacitor, 100 nF, +/- 10%, 50 V, 0805 (2012 Metric)", Capacitor Type=Ceramic, Case/Package=0805, Max Operating Temperature=125°C, Min Operating Temperature=-55°C, Tolerance=10%, Voltage Rating=50V, Mounting Technology=SM, Pins=2, RoHS Compliant=True
C133: library part CMP-13271-001831-1, "Cap Ceramic 1nF 500V X7R ±10% SMD 1206 +125°C Embossed T/R / CL31B102KGFNNNE", Case Code (Imperial)=1206, Case Code (Metric)=3216, Dielectric=X7R, Max Operating Temperature=125°C, Min Operating Temperature=-55°C, Package Quantity=1, Tolerance=10%, Voltage=500V, Capacitance=1nF, Case/Package=1206, Depth=1.6mm, Height=1.25mm, Length=3.2mm, Mount="Surface Mount", Packaging="Tape and Reel", Radiation Hardening=No, Thickness=0.055inch, Voltage Rating=500V, Voltage Rating (DC)=500V, Width=0.063inch
CD1: library part CMP-2000-05248-1, "Micro SD Memory Card Connector, 0.5 A, 10 V (DC), -25 to 85 degC, 8-Pin SMT, RoHS, Tape and Reel", Manufacturer=Molex, Standard Package=1, 3D Model=502774-0891.stp, Card Type=SecureDigital-microSD™, Catalog Drawings=502774-0891, Category=Connectors,Interconnects, Connector Type=ConnectorandEjector, Contact Finish=Gold, Contact Finish Thickness=20µin(0.51µm), Datasheet URL=https://datasheet.ciiva.com/1104/1499551-1104671.pdf, Datasheet Version="Rev. D, 04/2004", Ejector Side=-, Family=MemoryConnectors-PCCardSockets, Features=Switch, Height Above Board="0.071\"(1.80mm)", Insertion, Removal Method=PushIn,PushOut, Manufacturer URL=http://www.molex.com/, Mounting Feature=Reverse-Bottom, Mounting Type=SurfaceMount,RightAngle, Number of Positions=10(8+2), Online Catalog=microSD™Series, Other Names=WM24066DKR, Packaging=Digi-Reel, RoHS Information=502774-0891CertofCompliance, Series=502774
D1 D11_1 D11_2 D11_3 D11_4 D12_1 D12_2 D12_3 D12_4 D14 D15: library part CMP-08607-000063-1, "TVS DIODE 26V 42.1V DO214AA", Breakdown Voltage=28.9V, Clamping Voltage=42.1V, Manufacturer=Littelfuse, Max Junction Temp=+150°C, Package=SMBJ, Peak Pulse Current=14.3A, Peak Pulse Power=600W, Reverse Standoff Voltage=26V, Temperature="-65°C to +150°C", Temperature Range Low=-65°C, Automotive=No, Category=Diode, ComponentLink2Description=Datasheet, ComponentLink2URL=https://www.littelfuse.com/~/media/electronics/datasheets/tvs_diodes/littelfuse_tvs_diode_smbj_datasheet.pdf.pdf, Device Class L1="Circuit Protection", Device Class L2="TVS Diodes", Device Class L3=unset, Digikey Description="TVS DIODE 26V 42.1V DO214AA", Direction=Unidirectional, Height=2.61mm, Lead Free=Yes, Manufacturer Part Number=SMBJ26A, Mouser Description="TVS Diodes - Transient Voltage Suppressors 26Vr 600W 14.3A 5% UniDirectional", Number of Channels=1, Octopart=https://octopart.com/smbj26a-littelfuse-350771, RoHS=TRUE, Temperature Range High=+150°C
D2 D4 D7: library part CMP-004-00005-2, "Schottky Barrier Rectifier, 40 V, 1 A, -65 to 125 degC, 2-Pin SOD123, RoHS, Tape and Reel", Case/Package=SOD123, Manufacturer="Micro Commercial Components", Package Description="2-Pin Small Outline Diode, Body 2.7 x 1.6 mm, Height 1.35 mm", Datasheet URL=http://www.mccsemi.com/up_pdf/B5817W-B5819W(SOD-123).pdf, Datasheet Version="Rev. B, 01/2013", Manufacturer URL=http://www.mccsemi.com/, Mounting Technology=SM, Package Reference=SOD123, Package URL=http://www.mccsemi.com/up_pdf/1N4448W(SOD-123).pdf, RoHS Compliant=Unknown
D3: "TVS Diode (Uni-directional)", Manufacturer_Name=STMicroelectronics, Mouser Part Number=511-SM6T7V5A, Arrow Part Number=SM6T7V5A, Arrow Price/Stock=https://www.arrow.com/en/products/sm6t7v5a/stmicroelectronics?region=nac, Datasheet Link=https://www.st.com/resource/en/datasheet/sm6t100a.pdf, Height=2.65mm, Manufacturer_Part_Number=SM6T7V5A, Mouser Price/Stock=https://www.mouser.co.uk/ProductDetail/STMicroelectronics/SM6T7V5A?qs=DcAdhm6iCnod0UVazzWDng%3D%3D
D5: library part CMP-20229-000003-1, "DIODE ZENER 3.3V 150MW 0603", Case/Package=SMD/SMT, Max Operating Temperature=125°C, Max Power Dissipation=150mW, Max Reverse Leakage Current=25uA, Min Operating Temperature=-55°C, Output Current=500mA, Package Quantity=1, Tolerance=5%, Voltage Rating (DC)=3.3V, Zener Current=5mA, Element Configuration=Single, Impedance=95R, Lead Free="Lead Free", Mount="Surface Mount", Packaging="Tape and Reel", Power Dissipation=150mW, Power Rating=150mW, Voltage Tolerance=5%, Zener Voltage=3.3V
D6: library part SS54BF-HF, "Schottky Diode", Manufacturer_Name="Comchip Technology", Mouser Part Number=750-SS54BF-HF, Arrow Part Number=SS54BF-HF, Arrow Price/Stock=https://www.arrow.com/en/products/ss54bf-hf/comchip-technology?region=nac, Datasheet Link=https://www.mouser.co.uk/datasheet/2/80/20190807092834-2504956.pdf, Height=1.3mm, Manufacturer_Part_Number=SS54BF-HF, Mouser Price/Stock=https://www.mouser.co.uk/ProductDetail/Comchip-Technology/SS54BF-HF?qs=GBLSl2AkirsPcLFwlU2Ctg%3D%3D
D8: library part CMP-004-00002-2, "Fast Switching Diode, 75 V, 0.3 A, -65 to 150 degC, 2-Pin SOD323, RoHS, Tape and Reel", Case/Package=SOD, Forward Current=300mA, Forward Voltage=1.25V, Manufacturer="Diodes Inc", Max Operating Temperature=150°C, Max Surge Current=2A, Min Operating Temperature=-65°C, Package Description="2-Pin Small Outline Diode, Body 1.7 x 1.3 mm", Package Quantity=3000, Package Reference=SOD323-2, Peak Reverse Current=1uA, Datasheet URL=http://www.diodes.com/datasheets/ds30097.pdf, Datasheet Version="Rev. 25-2, 03/2016", Elements=1, Manufacturer URL=http://www.diodes.com/, Mounting Technology=SM, Packaging=TapeandReel, Pins=2, Recovery Time=4ns, RoHS Compliant=True
D9 D10: library part CMP-1674-00011-2, "LED RED CLEAR CHIP SMD", Case Code (Imperial)=0603, Case Code (Metric)=1608, Color=Red, Forward Current=30mA, Forward Voltage=2.4V, Lens Color=Colorless, Max Operating Temperature=85°C, Min Operating Temperature=-55°C, Package Quantity=1, Power Dissipation=75mW, Reverse Voltage=5V, Test Current=20mA, Case/Package=0603, Depth=0.8mm, Dominant Wavelength=631nm, Height=0.8mm, Illumination Color=Red, Lead Free="Lead Free", Length=1.6mm, Lens Style=Diffused, Lens Transparency=Clear, Luminous Intensity=54mcd, Mount="Surface Mount", Number of Elements=1, Number of LEDs=1, Number of Pins=2, Packaging="Tape and Reel", Power Rating=75mW, Radiation Hardening=No, Viewing Angle=130°, Wavelength=639nm, Width=0.8mm
D13: library part CMP-12792-000034-1, "DIODE ZENER 12V 500MW SOD123", Case/Package=SOD-123-2, Forward Voltage=900mV, Max Operating Temperature=150°C, Max Power Dissipation=500mW, Max Reverse Current=50nA, Min Operating Temperature=-65°C, Output Current=40mA, Package Quantity=3000, Test Current=50uA, Tolerance=5%, Voltage Rating (DC)=12V, Contact Plating=Tin, Element Configuration=Single, ESD Protection=No, Height=1.35mm, Lead Free="Lead Free", Length=3.85mm, Max Reverse Leakage Current=50nA, Mount="Surface Mount", Number of Pins=2, Packaging="Tape and Reel", Power Dissipation=500mW, Power Rating=500mW, Radiation Hardening=No, REACH SVHC="No SVHC", RoHS Compliant=Yes, Series=-, Termination=SMD/SMT, Voltage Tolerance=5%, Weight=0.000353oz, Width=1.7mm, Working Voltage=12V, Zener Current=50nA, Zener Voltage=12V
D13_1 D13_2 D13_3 D13_4 D14_1 D14_2 D14_3 D14_4: library part CMP-08607-000024-1, "TVS DIODE 18V 29.2V DO214AA", Breakdown Voltage=20V, Clamping Voltage=29.2V, Manufacturer="Littelfuse Inc", Manufacturer Part Number=SMBJ18A, Max Junction Temp=+150°C, Package=SMBJ, Peak Pulse Current=20.6A, Peak Pulse Power=600W, Reverse Standoff Voltage=18V, Temperature="-65°C to +150°C", Temperature Range Low=-65°C, Automotive=No, Category=Diode, ComponentLink2Description=Datasheet, ComponentLink2URL=https://www.littelfuse.com/~/media/electronics/datasheets/tvs_diodes/littelfuse_tvs_diode_smbj_datasheet.pdf.pdf, Device Class L1="Circuit Protection", Device Class L2="TVS Diodes", Device Class L3=unset, Digikey Description="TVS DIODE 18V 29.2V DO214AA", Direction=Unidirectional, Height=2.61mm, Lead Free=Yes, Mouser Description="TVS Diodes - Transient Voltage Suppressors 18Vr 600W 20.6A 5% UniDirectional", Number of Channels=1, Octopart=https://octopart.com/smbj18a-littelfuse-35303, RoHS=TRUE, Temperature Range High=+150°C
FB1 FB2: "Ferrite Bead", Manufacturer_Name=SUNLORD, Datasheet Link=https://datasheet.lcsc.com/szlcsc/Sunlord-GZ1608D601TF_C1002.pdf, Height=0.95mm, Manufacturer_Part_Number=GZ1608D601TF
J1 J4 J5 J6 J9: library part CMP-1502-00278-1, "Male PCB Connector WR-DSUB, Vertical, 25 pins", Contact Resistance=30mOhm, Manufacturer="Wurth Elektronik", Operating Temperature=-40to85degC, Rated Current=3A, Working Voltage=125VAC, Datasheet URL=https://katalog.we-online.de/em/datasheet/6180xx25023.pdf, Gender=Male, Manufacturer URL=http://www.we-online.de, Mounting Technology=THT, Orientation=Vertical, Package Reference=61802525023, Packaging=Tray, Part Number=61802525023, Pin Number=25, Publisher=WurthElektronik
J2 J3 J11: "Connector", Manufacturer_Name=Amass, Datasheet Link=https://www.tme.eu/Document/ce4077e36b79046da520ca73227e15de/XT30PW%20SPEC.pdf, Height=5mm, Manufacturer_Part_Number=XT30PW-F
J7 J8: library part CMP-17439-000068-1, "CONN HEADER SMD R/A 3POS 1.25MM", Color=Natural, Current Rating=1A, Flammability Rating="UL94 V-0", Max Operating Temperature=85°C, Min Operating Temperature=-25°C, Voltage Rating=50V, Connector Type=Header, Contact Finish - Mating=TIN, Contact Material=Bronze, Contact Plating=Tin, Contact Shape=Rectangular, Contact Type="Outer Shroud Contact", Fastening Type=Ramp, Gender=Male, Housing Color=Natural, Housing Material=Nylon, Insulation Color=Natural, Insulation Material=Nylon, Lead Free="Lead Free", Mount="Surface Mount", Number of Contacts=3, Number of Positions=3, Number of Rows=1, Orientation="Right Angle", Packaging="Tape and Reel", Pitch=0.049inch, REACH SVHC="No SVHC", Series=GH, Termination=Solder, Voltage Rating (AC)=50V, Wire/Cable Gauge=26AWG
J10: library part CMP-02757-000001-1, "CONN RCPT USB2.0 MINI B SMD R/A", Max Operating Temperature=85°C, Max Voltage Rating (AC)=30V, Min Operating Temperature=-50°C, Package Quantity=1, Connector Type=USB, Contact Material=Bronze, Contact Plating=Gold, Depth=9.2mm, Gender=Receptacle, Housing Material=Thermoplastic, Insulation Material=Thermoplastic, Length=9.9mm, Mount="Surface Mount", Number of Contacts=5, Number of Ports=1, Number of Terminals=5, Orientation="Right Angle", Packaging=Tray, Pitch=0.8mm, Radiation Hardening=No, REACH SVHC="No SVHC", Termination=Solder, USB Standard="USB 2.0"
L1: library part IHLP3232DZER220M11, "Inductor， IHLP3232DZER220M11, 3.3A sat", Manufacturer_Name=Vishay, Mouser Part Number=70-IHLP3232DZER220M1, Arrow Part Number=IHLP3232DZER220M11, Arrow Price/Stock=https://www.arrow.com/en/products/ihlp3232dzer220m11/vishay?utm_currency=USD&region=nac, Datasheet Link=http://uk.rs-online.com/web/p/products/8523797, Height=4mm, Manufacturer_Part_Number=IHLP3232DZER220M11, Mouser Price/Stock=https://www.mouser.co.uk/ProductDetail/Vishay-Dale/IHLP3232DZER220M11?qs=Nbmv7C3%2FzlDWnanygNMaBQ%3D%3D
LED1 LED2 LED3 LED4: library part CMP-007-00041-3, "Chip LED 0402, Green, 0.02 A, 3.1 to 3.7 V, -40 to 80 degC, 2-Pin SMD, RoHS, Tape and Reel", Case/Package=0402, Colour=Green, Mounting Technology=SMT, Pins=2, RoHS Compliant=Yes
O1: "Crystal or Oscillator", Manufacturer_Name="Renesas Electronics", Mouser Part Number=972-LH536050.000000I, Datasheet Link=https://www.idt.com/document/dst/xl-family-low-phase-noise-quartz-based-pll-oscillators-datasheet, Height=1.2mm, Manufacturer_Part_Number=XLH536050.000000I, Mouser Price/Stock=https://www.mouser.co.uk/ProductDetail/Renesas-Electronics/XLH536050.000000I?qs=Sm3NkJ%2FXO7%2FQbqd%2FGPxUSA%3D%3D
P1: library part CMP-2000-05352-1, "Male Header, Pitch 1.27 mm, 2 x 5 Position, Height 6.12 mm, RoHS, Tube", Color=Black, Manufacturer=Samtec, Package Description="Male Header, Pitch 1.27 mm, 2 x 5 Position, Height 5.97 mm, Tail Length 4.32 mm", Package Reference=FTSH-105-01-L-DV-K, Category=Connectors,Interconnects, Connector Type=Header,Shrouded, Contact Finish=Gold, Contact Finish Thickness=3µin(0.08µm), Contact Mating Length="0.120\"(3.05mm)", Contact Type=MalePin, Datasheet URL=http://suddendocs.samtec.com/prints/ftsh-1xx-xx-xxx-dv-xxx-mkt.pdf, Datasheet Version="Rev. ET, 10/1995", Family=RectangularConnectors-Headers,MalePins, Fastening Type=-, Features=-, Manufacturer URL=http://www.samtec.com/, Mounting Type=SurfaceMount, Number of Positions=10, Number of Positions Loaded=All, Number of Rows=2, Package URL=http://suddendocs.samtec.com/prints/ftsh-1xx-xx-xxx-dv-xxx-footprint.pdf, Packaging=Tube, Pitch="0.050\"(1.27mm)", Row Spacing="0.050\"(1.27mm)", Series=FTSH, Termination=Solder
Q1_1 Q1_2 Q1_3 Q1_4 Q2_1 Q2_2 Q2_3 Q2_4: "MOSFET (N-Channel)", Manufacturer_Name="Alpha & Omega Semiconductors", Arrow Part Number=AOD4126, Arrow Price/Stock=https://www.arrow.com/en/products/aod4126/alpha-and-omega-semiconductor, Datasheet Link=http://aosmd.com/res/data_sheets/AOD4126.pdf, Height=2.4mm, Manufacturer_Part_Number=AOD4126
Q3 Q4: library part CMP-1091-00030-1, "N-Channel OptiMOS 3 Power-Transistor, 100 V VDS, 90 A ID, -55 to 150 degC, PG-TDSON-8-1, Reel, Green", Manufacturer=Infineon, ComponentLink1Description="Manufacturer URL", ComponentLink1URL=http://www.infineon.com/, ComponentLink2Description=Datasheet, ComponentLink2URL=http://www.infineon.com/dgdl/BSC060N10NS3+Rev2.4.pdf?folderId=db3a304313b8b5a60113cee8763b02d7&fileId=db3a30431ce5fb52011d1aab7f90133a, ComponentLink3Description="Package Specification", ComponentLink3URL=http://www.infineon.com/cms/packages/SMD_-_Surface_Mounted_Devices/P-PG-TDSON/P-PG-TDSON-08-01x_2x_3.html?__locale=en, DatasheetVersion="Rev. 2.4", Green=TRUE, Halogen-free=TRUE, ID (max)="90Â A", IDpuls (max)="360Â A", Mounting Technology="Surface Mount", PackageDescription="8-Pin Plastic (Green) Thin Dual Small Outline Non-Leaded Package, 5.15 x 5.9 mm Body, 1.27 mm Pitch", PackageReference=PG-TDSON-8-1, Packing=Reel, PartNumber="BSC060N10NS3 G", Polarity=N, Ptot (max)="125Â W", QG="51Â nC", RDS (on) (max)="6Â mOhm", Rth="1Â K/W", RthJA (max)="50Â K/W", RthJC (max)="1Â K/W", VDS (max)="100Â V", VGS(th) (max)="3.5Â V", VGS(th) (min)="2Â V"
R1 R102_1 R102_2 R102_3 R102_4 R104_1 R104_2 R104_3 R104_4 R109: library part CMP-03412-005805-1, "RES 0.001 OHM 1% 2W 2512", Manufacturer=Yageo, Manufacturer Part Number=PA2512FKE7W0R001E, Package=PA2512E-0R001-0R004, Power Rating=2W, Resistance=1mΩ, Temperature="-55°C to +170°C", Temperature Coefficient=50ppm/°C, Temperature Range High=+170°C, Temperature Range Low=-55°C, Tolerance=1%, Automotive=Yes, Automotive Grade="Grade 0", Category=Res, ComponentLink2Description=Datasheet, ComponentLink2URL=http://www.yageo.com/documents/recent/PYu-PA_E_51_RoHS_10.pdf, Composition="Metal Element", Device Class L1="Passive Components", Device Class L2=Resistors, Device Class L3="Chip SMD Resistors", Digikey Description="METAL CURRENT SENSOR 2512 1% 50P", Height=0.88mm, Ipc Land Pattern Name=RESC635318X63, Lead Free=Yes, Octopart=https://octopart.com/pa2512fke7w0r001e-yageo-96322220, RoHS=TRUE, Series=PA_E
R2 R110: library part CMP-03412-037786-1, "RES SMD 200K OHM 1% 1/10W 0603", Case Code (Imperial)=0603, Case Code (Metric)=1608, Max Operating Temperature=155°C, Max Power Dissipation=100mW, Min Operating Temperature=-55°C, Package Quantity=1, Resistance=200kR, Resistance Tolerance=1%, Resistor Type="Thick Film", Temperature Coefficient=100ppm/°C, Voltage Rating=50V, Case/Package=0603, Construction=Rectangular, Depth=0.8mm, Features="Moisture Resistant", Height=0.022inch, Lead Free="Lead Free", Length=1.6mm, Military Standard=Not, Number of Pins=2, Number of Terminations=2, Packaging="Tape and Reel", Power Rating=100mW, REACH SVHC="No SVHC", RoHS Compliant=Yes, Series=RC, Size Code=0603, Termination=SMD/SMT, Tolerance=1%, Voltage Rating (DC)=50V, Width=0.031inch
R3 R5 R7 R85 R87 R92 R93 R111: library part CMP-2000-03092-2, "RES Thick Film, 22kΩ, 1%, 0.1W, 100ppm/°C, 0603", Case Code (Imperial)=0603, Case Code (Metric)=1608, Max Operating Temperature=155°C, Max Power Dissipation=100mW, Min Operating Temperature=-55°C, Package Quantity=10, Resistance=22kR, Temperature Coefficient=100ppm/°C, Tolerance=1%, Voltage Rating=75V, Case/Package=0603, Composition="Thick Film", Contact Plating=Tin, Depth=0.85mm, Features="Automotive AEC-Q200", Height=0.45mm, Lead Free="Lead Free", Length=1.55mm, Military Standard=Not, Mount="Surface Mount", Number of Terminations=2, Packaging="Tape and Reel", Power Rating=100mW, Radiation Hardening=No, Termination=SMD/SMT, Voltage Rating (DC)=75V, Weight=7.1E-05oz, Width=0.85mm
R4 R6 R8 R86 R88 R89 R90 R91 R94 R97 R98 R99 R100: library part CMP-009-00066-2, "10K 0.063W 1% 0402 (1005 Metric)  SMD", Case/Package=0402, Power=63mW, Tolerance=1%, Mounting Technology=SMT, Pins=2
R9: library part CMP-009-00023-5, "Chip Resistor, 100 KOhm, +/- 1%, 0.1 W, -55 to 155 degC, 0603 (1608 Metric)", Case/Package=0603, Max Operating Temperature=155°C, Min Operating Temperature=-55°C, Power=100mW, Tolerance=1%, Voltage Rating=50V, Mounting Technology=SM, Pins=2, RoHS Compliant=True
R10: library part CMP-02407-000581-1, "RES SMD 100200 OHM 1% 1/8W 0603", Case/Package=0603, Max Operating Temperature=155°C, Max Power Dissipation=125mW, Min Operating Temperature=-55°C, Package Quantity=5000, Resistance=10.2kR, Temperature Coefficient=50ppm/°C, Tolerance=1%, Composition="Thin Film", Depth=0.85mm, Height=0.022inch, Lead Free="Lead Free", Length=0.061inch, Military Standard=Not, Number of Terminations=2, Packaging="Tape and Reel", Width=0.033inch
R11: library part CMP-2002-08356-2, "RES Thick Film, 20kΩ, 1%, 0.063W, 100ppm/°C, 0402", Case Code (Imperial)=0402, Case Code (Metric)=1005, Max Operating Temperature=155°C, Max Power Dissipation=63mW, Min Operating Temperature=-55°C, Package Quantity=10, Resistance=20kR, Temperature Coefficient=100ppm/°C, Tolerance=1%, Voltage Rating=50V, Case/Package=0402, Composition="Thick Film", Contact Plating=Tin, Depth=0.5mm, Features="Automotive AEC-Q200", Height=0.35mm, Lead Free="Lead Free", Length=1mm, Military Standard=Not, Mount="Surface Mount", Number of Pins=2, Number of Terminations=2, Packaging="Tape and Reel", Power Rating=63mW, Radiation Hardening=No, Termination=SMD/SMT, Voltage Rating (DC)=50V, Weight=2.3E-05oz, Width=0.5mm, Working Voltage=50V
R12 R103_1 R103_2 R103_3 R103_4 R105_1 R105_2 R105_3 R105_4: library part CMP-2001-04908-2, "RES Thick Film, 10kΩ, 1%, 0.125W, 100ppm/°C, 0805", Case Code (Imperial)=0805, Case Code (Metric)=2012, Max Operating Temperature=155°C, Min Operating Temperature=-55°C, Package Quantity=5000, Power Rating=125mW, Resistance=10kR, Temperature Coefficient=100ppm/°C, Tolerance=1%, Voltage Rating=150V, Case/Package=0805, Composition="Thick Film", Contact Plating=Tin, Depth=1.25mm, Height=0.45mm, Lead Free="Lead Free", Length=2mm, Military Standard=Not, Packaging="Tape and Reel", Radiation Hardening=No, Termination=SMD/SMT, Voltage Rating (DC)=150V, Weight=0.000194oz, Width=1.25mm
R13: library part CMP-2002-08313-2, "CRCW04021K96FKED  RES Thick Film, 1.96kΩ, 1%, 0.063W, 100ppm/°C, 0402", Case Code (Imperial)=0402, Case Code (Metric)=1005, Max Operating Temperature=155°C, Max Power Dissipation=63mW, Min Operating Temperature=-55°C, Package Quantity=10, Resistance=1.96kR, Temperature Coefficient=100ppm/°C, Tolerance=1%, Voltage Rating=50V, Case/Package=0402, Composition="Thick Film", Contact Plating=Tin, Depth=0.5mm, Features="Automotive AEC-Q200", Height=0.35mm, Length=1mm, Military Standard=Not, Number of Pins=2, Number of Terminations=2, Packaging="Tape and Reel", Power Rating=63mW, Radiation Hardening=No, Termination=SMD/SMT, Weight=2.3E-05oz, Width=0.5mm
R14: library part CMP-009-00138-3, "Chip Resistor, 2 kOhms, +/-5 %, 63 mW, -55 to 155 degC, 0402", Case/Package=0402, Max Operating Temperature=155°C, Min Operating Temperature=-55°C, Power=63mW, Tolerance=5%, Pins=2
R15 R16 R17 R18 R19 R28 R29 R30 R31 R32 R41 R42 R43 R44 R45 R46: library part CMP-009-00167-3, "Chip Resistor, 100 Ohms, +/-1 %, 63 mW, -55 to 155 degC, 0402", Case/Package=0402, Max Operating Temperature=155°C, Min Operating Temperature=-55°C, Power=63mW, Tolerance=1%, Pins=2
R20 R21 R22 R23 R24 R25 R26 R27 R33 R34 R35 R36 R37 R38 R39 R40: library part CMP-03211-005642-1, "CRGCQ 0402 10M 5%", Ambient Temperature Range High=+70°C, Manufacturer="TE Connectivity", Manufacturer Part Number=CRGCQ0402J10M, Package=CRGCQ0402, Power Rating=0.0625W, Resistance=10MΩ, Temperature="-55°C to +155°C", Temperature Coefficient=±100ppm/°C, Temperature Range High=+155°C, Temperature Range Low=-55°C, Tolerance=0.05, Voltage Rating=50V, Automotive=Yes, Category=Res, ComponentLink2Description=Datasheet, ComponentLink2URL=https://www.te.com/commerce/DocumentDelivery/DDEController?Action=showdoc&DocId=Data+Sheet%7F1773204-3%7F1%7Fpdf%7FEnglish%7FENG_DS_1773204-3_1.pdf%7F4-2176347-1607, Composition="Thick Film", Device Class L1="Passive Components", Device Class L2=Resistors, Device Class L3="Chip SMD Resistors", Digikey Description="CRGCQ 0402 10M 5%", Height=0.4mm, Ipc Land Pattern Name=RESC10050X35, Lead Free=Yes, Octopart=https://octopart.com/crgcq0402j10m-te+connectivity-91017994, RoHS=TRUE, Series=CRGCQ
R47 R48 R95 R96: library part CMP-03412-036690-2, "RES 33Ω 1.00% 0.1W 0603", Case Code (Imperial)=0603, Case Code (Metric)=1608, Max Operating Temperature=155°C, Max Power Dissipation=100mW, Min Operating Temperature=-55°C, Ratings=AEC-Q200, Resistance=33R, Resistor Type="Thick Film", Temperature Coefficient=100ppm/°C, Tolerance=1%, Voltage Rating=50V, Case/Package=0603, Features="Moisture Resistant", Height=0.45mm, Length=1.6mm, Number of Terminations=2, Packaging="Tape and Reel", Power Rating=100mW, RoHS Compliant=Yes, Series=AC, Termination=SMD/SMT, Width=0.8mm